# Altium PCB LED OSRAM.PcbDoc
Units mm, origin at the board's own origin, x right, y up, seen from the top; angles counter-clockwise.
Board outline 9.53 x 19.75 mm, 2 copper layers (Top Layer, Bottom Layer); 2 components, 2 nets, 4 pads, 0 vias.
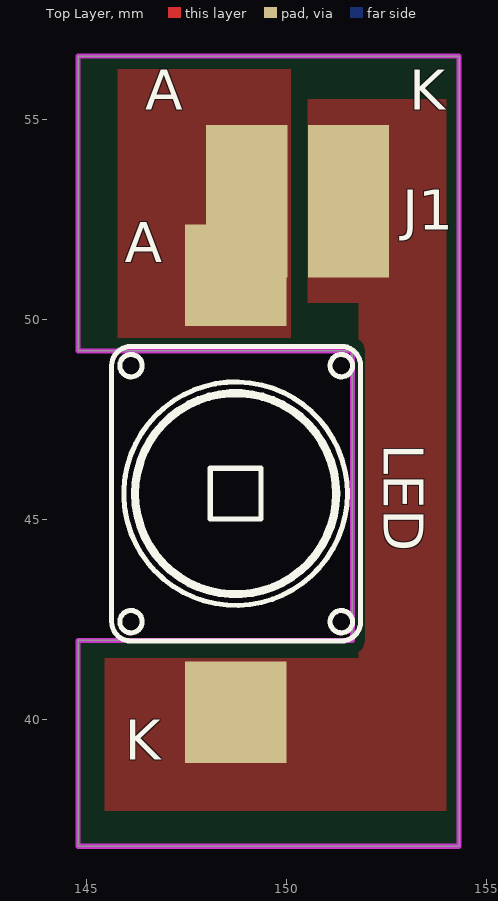
[diagram p0: Top Layer view]
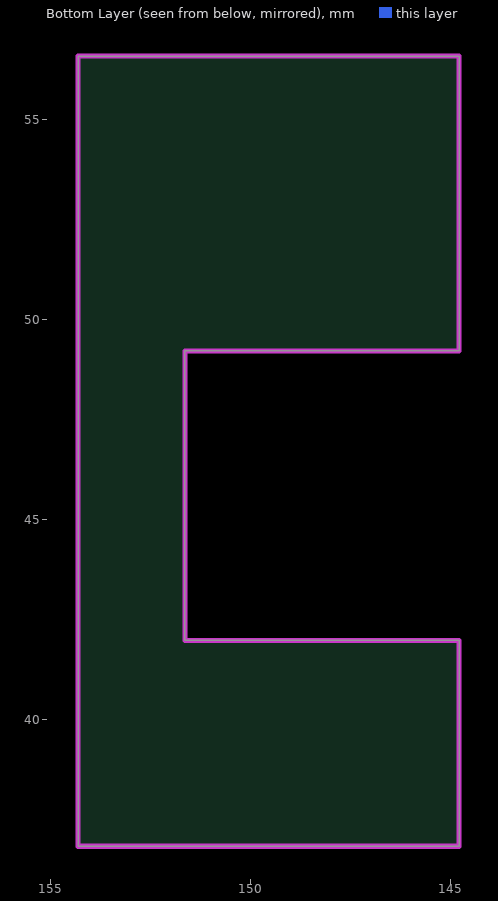
[diagram p1: Bottom Layer view, seen from below]

## Layer stack, top to bottom
Top Solder: solder mask 0.0102, Solder Resist, Dk 3.5
Top Layer: signal copper 0.0356
Dielectric 1: dielectric 0.32, FR-4, Dk 4.8
Bottom Layer: signal copper 0.0356
Bottom Solder: solder mask 0.0102, Solder Resist, Dk 3.5

## Board outline
144.78,36.83 144.78,41.977 151.638,41.977 151.638,49.216 144.78,49.216 144.78,56.582 154.305,56.582 154.305,36.83

## Design rules (kind name [scope] priority, off if disabled: settings)
Clearance [All] p1: gap=0.254 ignorepadtopadclearanceinfootprint=FALSE except(0: Arc-Hole Track-Hole SMDPad-Hole THPad-Hole Via-Hole Fill-Hole Poly-Hole Region-Hole Text-Hole)
ComponentClearance [All] p1 off: gap=0.254 collisioncheckmode=3 verticalgap=0.254 showdistances=FALSE
PlaneConnect [All] p1: planeconnectstyle=Direct reliefexpansion=0.508 reliefentries=4 reliefconductorwidth=0.254 reliefairgap=0.254
PolygonConnect [All] p1: connectstyle=Direct reliefconductorwidth=0.254 reliefentries=4 polygonreliefangle="90 Angle" airgapwidth=0.254
RoutingVias [All] p1: holewidth=0.711 width=1.27 viastyle="Through Hole" minholewidth=0.711 minwidth=1.27 maxholewidth=0.711 maxwidth=1.27
SolderMaskExpansion [All] p1: expansion=0.102
Width [All] p1: maxlimit=2.54 minlimit=0.254 preferedwidth=1.016
28 further rules are at their usual default settings.

## Components (designator, comment, footprint, x,y, rotation, side; value= is the part's Value field where it differs from the comment)
J1 "Jump đực loại cong, 2 chân 2.54mm, hàn dán như bản vẽ" HDR1x2 148.996,52.959 r0 top value=2P
LED "LED osram, hàn đúng mã, đúng cực, đáy LED dán silicon truyền nhiệt hoặc bôi keo tản nhiệt" OSRAM_GOLDENDRAGON 148.717,45.644 r0 top

## Footprints (in the part's own frame and the unit in brackets; to place one, negate y for a bottom-side part, rotate by r counter-clockwise, add the part's x,y. Pads: shape width x height; smd on the part's side, far side on the other; paste and mask are expansions set on the pad)
HDR1x2 [mil] "Connector; Header; 2 Position"
  rect 80x150 smd: 1(0,0) 2(100,0)
  body extent -51,-81 149,325, height 62
OSRAM_GOLDENDRAGON [mil]
  rect 100x100 smd: A(0,215) K(0,-215)
  silkscreen extent -122,-145 123,145, body extent -118,-217 118,217, height 69

## Part data
J1: library part CON2, Type1="Gi?c xanh lo?i n?m, 300V/16A - 5.08mm", Type2="Jump d?c lo?i th?ng, 2.54mm", Type3=Jumper, Type4="Gi?c xanh lo?i n?m, 300V/16A - 3.81mm", Type5="Jump d?c lo?i cong, 2 chân 2.54mm, hàn dán nhu b?n v?"
LED: library part Led

## Nets (pads, with @x,y where several pads share a name; then routed paths per layer and width w, separated by ;. In a path a pad name is that pad's centre, name@x,y a point inside that pad or via, vN(x,y) a via of type N, cw(c..) or ccw(c..) an arc to the next point about the centre after c; other vN are vias at no path point)
A: J1.1 LED.A
K: J1.2 LED.K

## Polygon pours and split planes (outlines as drawn)
A on Top Layer "NONET_L-01_P-001" (solid, remove dead copper, pour order 4): 150.089,49.149 145.764,49.149 145.764,56.286 150.089,56.286
K on Top Layer "NONET_L-01_P-001" (solid, remove dead copper, pour order 2): 145.44,41.529 151.79,41.529 151.79,50.419 150.52,50.419 150.52,55.499 154.33,55.499 154.33,37.719 145.44,37.719
no net on Top Layer "NONET_L-01_P-001" (solid, remove dead copper, pour order 0): 150.089,56.286

## Keep-outs
Keep-Out Layer:
  the board outline again, w0.127

## Silkscreen, mask and mechanical layers (free items; w line width, h text height)
Top Overlay:
  text "A" at 146.456,55.245 h1
  text "K" at 153.06,55.245 h1
  text "A" at 145.948,51.435 h1
  text "K" at 145.948,38.989 h1